# EAGLE board a (EAGLE 9.6.2)
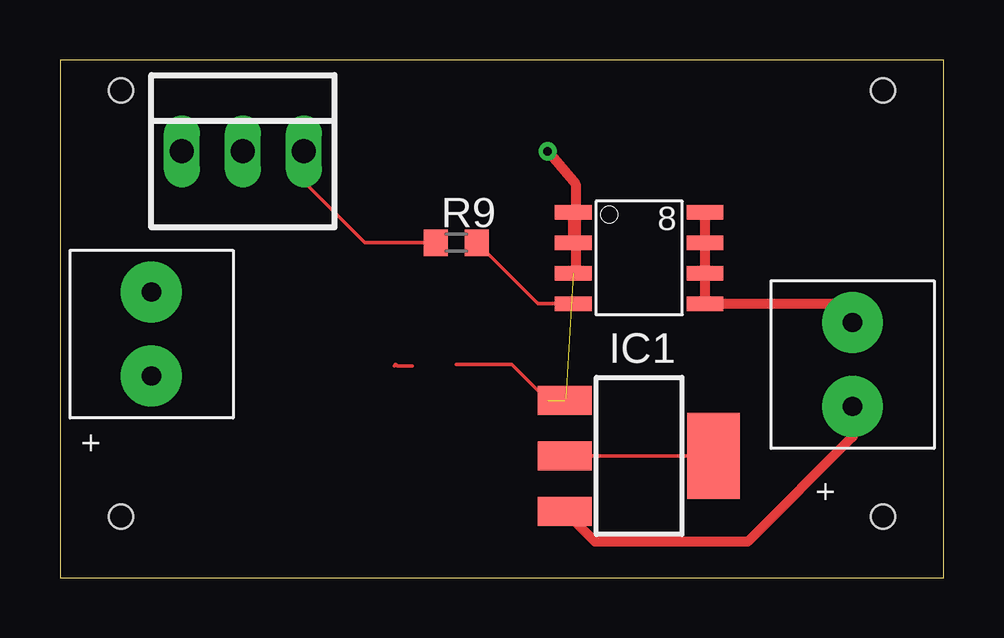
[diagram p0: board, top side]
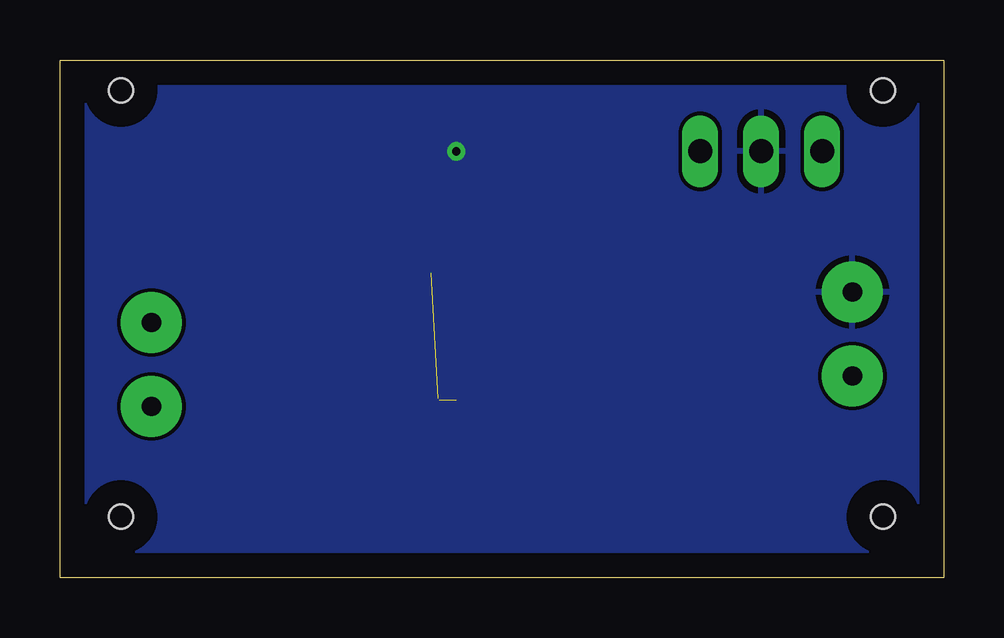
[diagram p1: board, bottom side, seen from below]

Size 36.83 x 21.59 mm. Coordinates in mm from the lower left corner, seen from the top.
Outline: 0,0 36.83,0 36.83,21.59 0,21.58 0,0
Copper layers (1*16): Top 0.035mm / dielectric 1.5mm / Bottom 0.035mm
Design rules "default": minimum track width 6mil, minimum drill 0.35mm, track to track 6mil, track to pad 6mil, pad to pad 6mil, via to via 6mil, smd to smd 6mil, copper to edge 40mil, drill to drill 6mil, minimum pad ring 10mil, minimum via ring 8mil, stop-mask expansion 4mil, vias tented up to drill 0mil, thermal gap 10mil
Holes 1 mm at 2.54,20.32 34.29,20.32 2.54,2.54 34.29,2.54

## Footprints (pad centres in the part's own frame; a part is rotated, then mirrored left to right if it is on the bottom)
SOT223 = smd 1.219 x 2.235: 1 -2.311,-3.099; 2 0,-3.099; 3 2.311,-3.099 | smd 3.6 x 2.2: TAB 0,3.099
KF350-2P = drill 0.8 pad 2.54: 1 -1.75,0; 2 1.75,0
R0603 = smd 1 x 1.1: 1 -0.85,0; 2 0.85,0
SO-8 = smd 1.524 x 0.61: 1 -2.743,1.905; 2 -2.743,0.635; 3 -2.743,-0.635; 4 -2.743,-1.905; 5 2.743,-1.905; 6 2.743,-0.635; 7 2.743,0.635; 8 2.743,1.905
22-23-2031 = drill 1 long: 1 -2.54,0; 2 0,0; 3 2.54,0

## Placement (x,y rotation side)
IC1  LM1117MPX-3.3  [SOT223]  24.13,5.08 270 top
PWR_IN  KF350-P2  [KF350-2P]  3.81,10.16 270 top
PWR_IN1  KF350-P2  [KF350-2P]  33.02,8.89 270 top
R9  10K  [R0603]  16.51,13.97 0 top
W  [SO-8]  24.13,13.33 0 top
X1  22-23-2031  [22-23-2031]  7.62,17.78 0 top

## Library data of the parts
IC1 = lm1117
PWR_IN PWR_IN1 = KF350-P2
R9 = resistor
W = transistor-fet
X1 = con-molex; MF: MOLEX; MPN: 22-23-2031; OC_FARNELL: 1462950; OC_NEWARK: 30C0862

## Nets
+3V3: IC1.2 IC1.TAB
DW: PWR_IN1.1 W.5 W.6 W.7 W.8
GND: IC1.1 PWR_IN.1 W.1 W.2 W.3 X1.2
N$1: PWR_IN.2
N$2: X1.1
N$13: R9.2 W.4
PWM: R9.1 X1.3
VDD: IC1.3 PWR_IN1.2

## Tracks (layer width: path | path; a pad name or v marks a point on that pad's centre or on a via)
+3V3
  Top 0.152: 27.48,5.03 27.38,5.08 27.33,5.08 | 27.33,5.08 IC1.TAB | IC1.TAB IC1.2 | 27.23,5.03 IC1.TAB | 20.98,5.18 IC1.2 | IC1.TAB 27.33,5.03 27.33,5.08 | 20.93,5.18 IC1.2
DW
  Top 0.152: 33.02,10.77 PWR_IN1.1
  Top 0.406: W.8 W.7 26.87,13.87 W.6 26.87,12.65 W.5 32.23,11.43 PWR_IN1.1
GND  (via drill 0.35)  (2 unrouted)
  Top 0.152: 21.49,13.87 W.2 | W.2 21.49,14.02 21.39,14.02 | 21.49,12.8 W.3 | 21.39,14.02 21.23,14.17 21.23,15.09 W.1 | 21.39,14.02 W.2 | 21.54,13.87 W.2 | 21.08,7.47 IC1.1 | 16.51,8.89 18.82,8.89 20.32,7.39
  Top 0.406: v20.32,17.78 21.49,16.41 21.49,14.02 21.49,12.8
  pour Bottom: 0,21.51 36.83,21.51 36.83,0 0,0
N$1
  Top 0.152: 3.86,8.38 PWR_IN.2
N$2
  Top 0.152: 5.08,17.68 X1.1
N$3
  Top 0.152: 14.68,8.84 14.07,8.84 13.97,8.89 13.92,8.84
N$13
  Top 0.152: W.4 19.9,11.43 R9.2
PWM
  Top 0.152: R9.1 12.7,13.97 10.16,16.51 X1.3
VDD
  Top 0.152: 20.98,2.74 IC1.3 20.93,2.59
  Top 0.406: IC1.3 22.3,1.5 28.65,1.5 33.02,5.87 PWR_IN1.2

## Text on the board
tPlace: + | +